# EAGLE board Sonar-Three-Amp-Block (EAGLE 8.7.1)
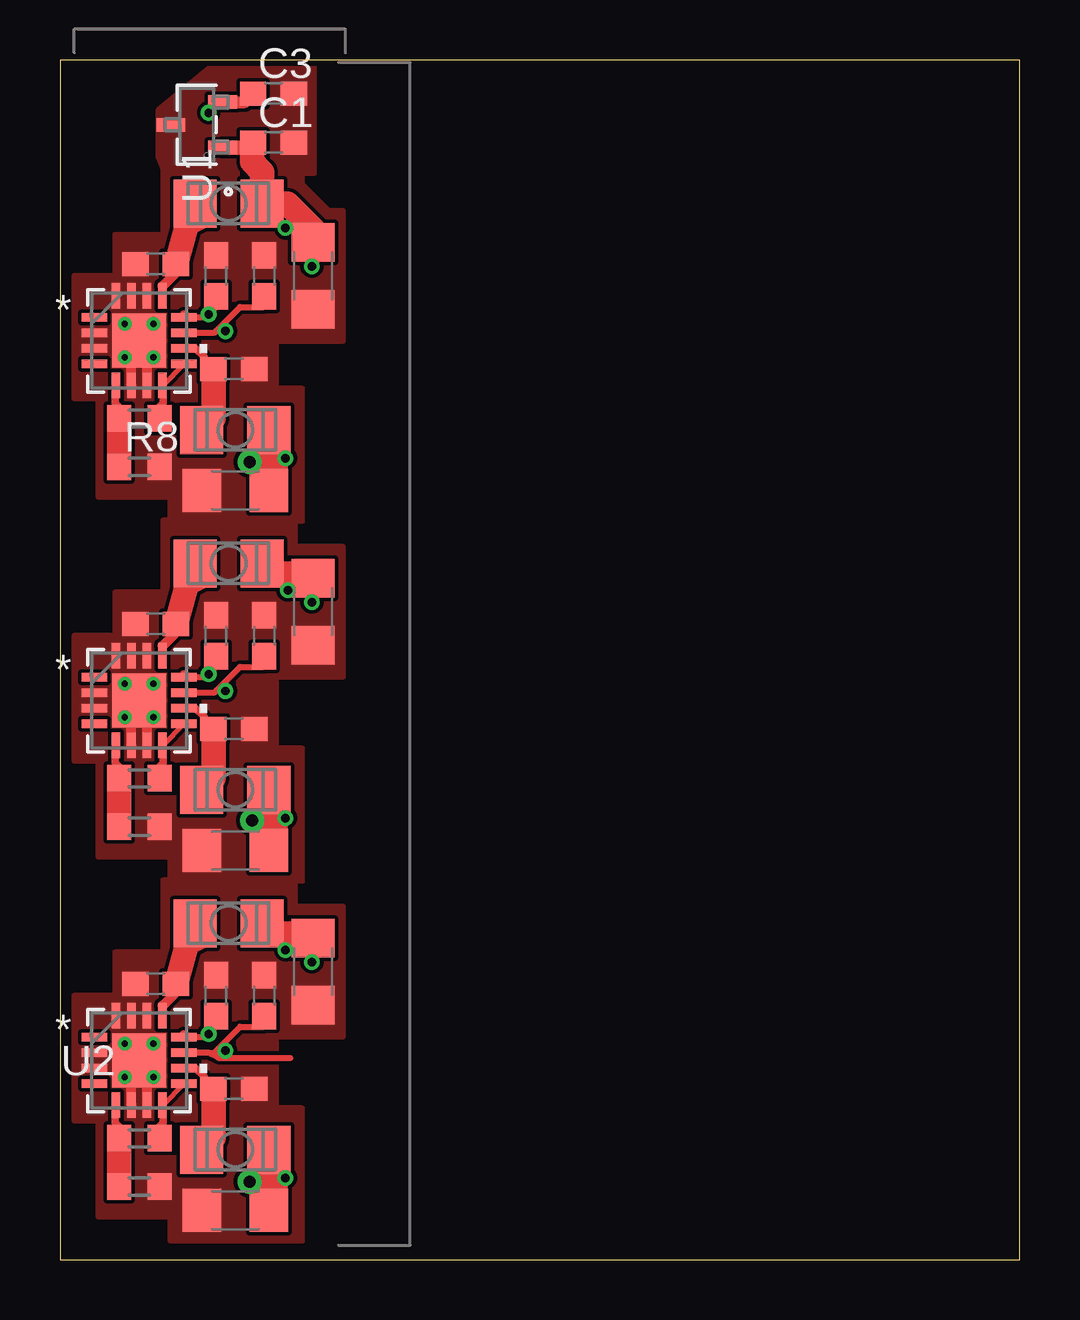
[diagram p0: board, top side]
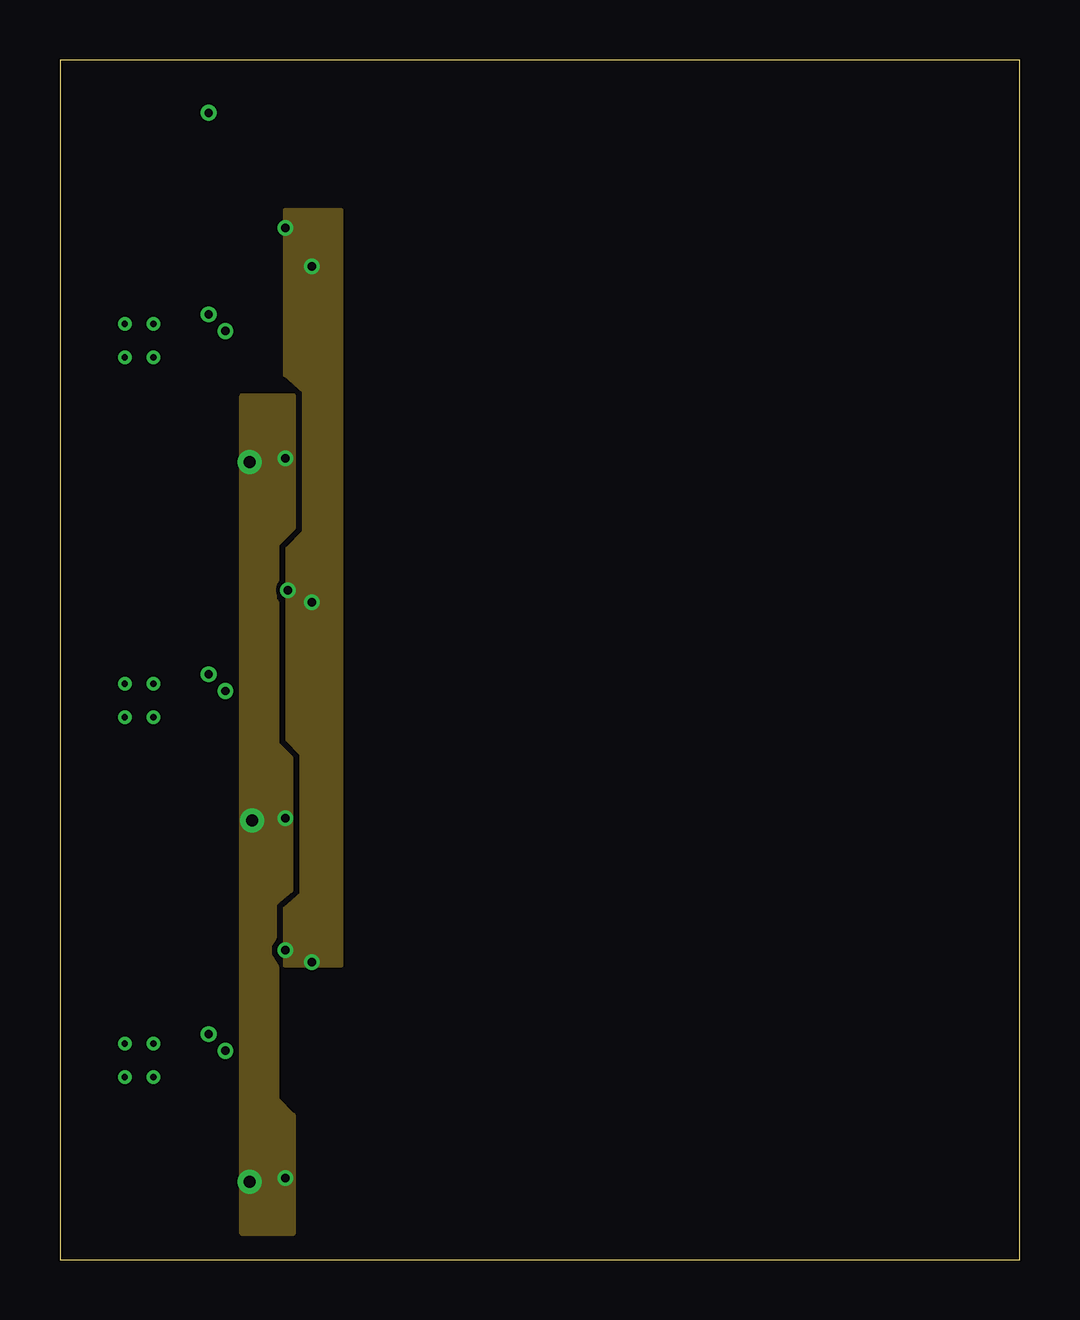
[diagram p1: board, inner layer Route15]
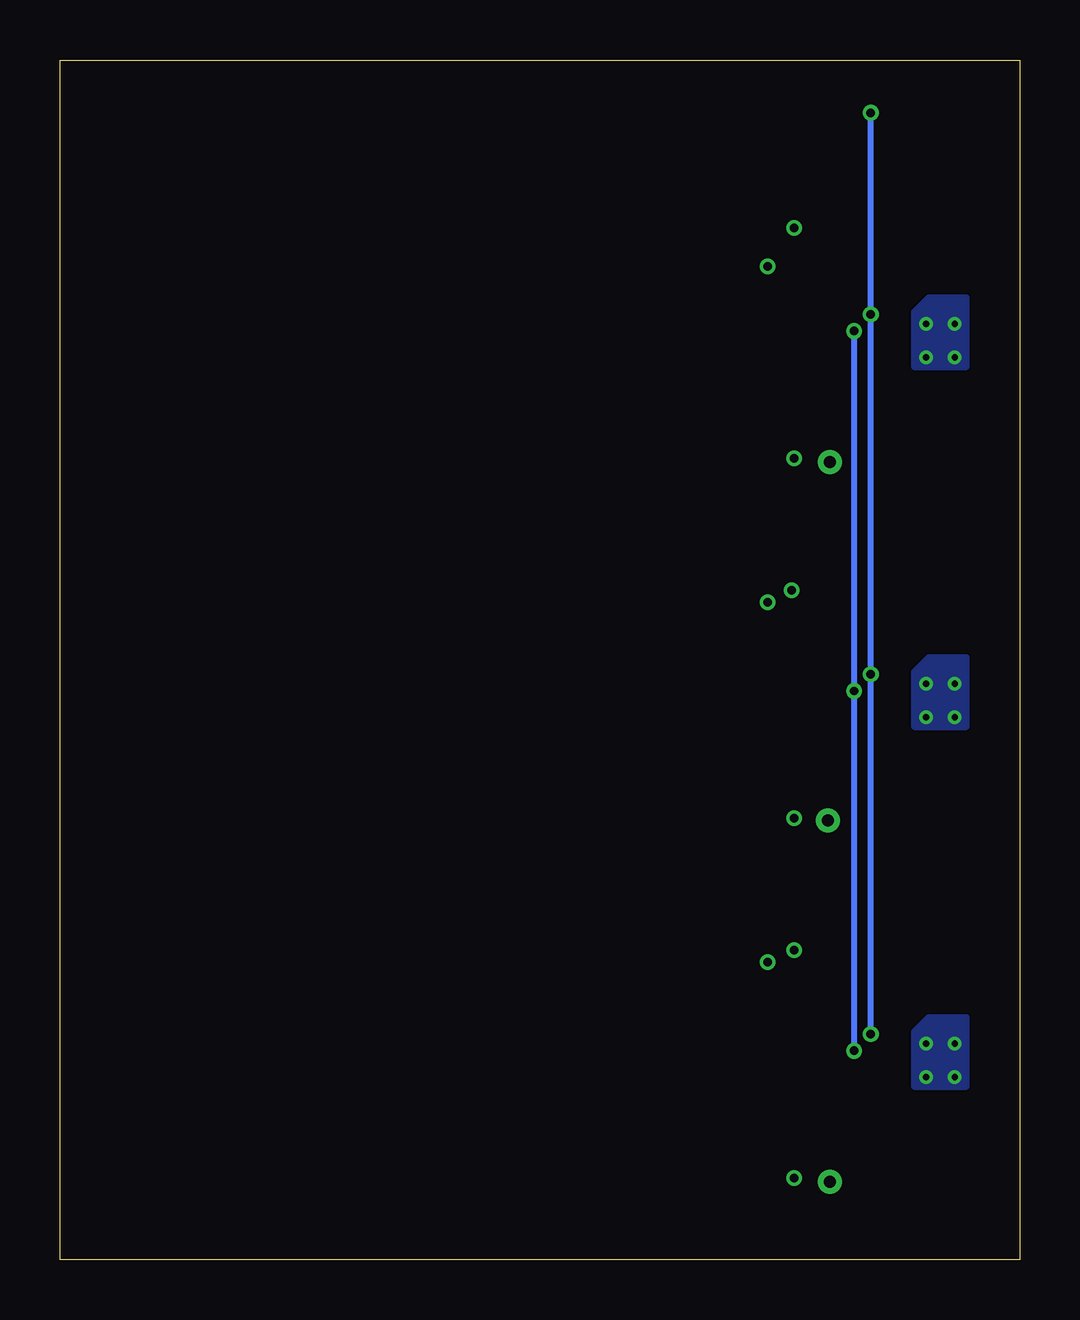
[diagram p2: board, bottom side, seen from below]

Size 40 x 50 mm. Coordinates in mm from the lower left corner, seen from the top.
Outline: 0,0 40,0 40,50 0,50 0,0
Copper layers (1*2*15*16): Top 0.035mm / dielectric 0.1702mm / Route2 0.0175mm / dielectric 47mil / Route15 0.0175mm / dielectric 0.1702mm / Bottom 0.035mm
Design rules "JLCPCB4Layer": minimum track width 6mil, minimum drill 10mil, track to track 6mil, track to pad 6mil, pad to pad 6mil, via to via 6mil, smd to smd 0mil, copper to edge 10mil, drill to drill 10mil, minimum pad ring 6mil, minimum via ring 6mil, stop-mask expansion 2mil, vias tented up to drill 100mil, thermal gap 10mil

## Footprints (pad centres in the part's own frame; a part is rotated, then mirrored left to right if it is on the bottom)
C0603 = smd 1.1 x 1: 1 -0.85,0; 2 0.85,0
C1206 = smd 1.6 x 1.8: 1 -1.4,0; 2 1.4,0
L3225P = smd 1.8 x 2: 1 -1.4,0; 2 1.4,0
R0603 = smd 1 x 1.1: 1 -0.85,0; 2 0.85,0
P3_064 = smd 0.559 x 1.194: 1 -0.95,-1.079; 2 0.95,-1.079; 3 0,1.079
CP_16_4 = smd 2.261 x 2.261: GND1 0,0 | smd 1.067 x 0.356: GNEG 1.865,0.975; GPOS 1.865,0.325; INPP -1.865,-0.975; PWRA -1.865,0.325; VCOM -1.865,-0.325; VGAI 1.865,-0.975; VNEG 1.865,-0.325; VOUT -1.865,0.975 | smd 0.356 x 1.067: INPN -0.975,-1.865; NC 0.325,-1.865; NC1 -0.325,-1.865; NC2 0.325,1.865; NC3 -0.325,1.865; NC4 -0.975,1.865; PRAO 0.975,-1.865; VPOS 0.975,1.865

## Placement (x,y rotation side)
C1  0.1uF  [C0603]  8.9,46.55 0 top
C3  0.1uF  [C0603]  8.9,48.6 0 top
C7  0.1uF  [C0603]  7.25,7.11 0 top
C8  10uF  [C1206]  7.31,2.05 180 top
C9  0.1uF  [C0603]  3.99,11.5 180 top
C10  10uF  [C1206]  10.55,12 270 top
C11  0.1uF  [C0603]  6.5,11 90 top
C12  1nF  [C0603]  8.52,11 90 top
C19  0.1uF  [C0603]  7.25,37.11 0 top
C20  10uF  [C1206]  7.31,32.05 180 top
C21  0.1uF  [C0603]  3.99,41.5 180 top
C22  10uF  [C1206]  10.55,41 270 top
C23  0.1uF  [C0603]  6.5,41 90 top
C24  1nF  [C0603]  8.52,41 90 top
C31  0.1uF  [C0603]  7.25,22.11 0 top
C32  10uF  [C1206]  7.31,17.05 180 top
C33  0.1uF  [C0603]  3.99,26.5 180 top
C34  10uF  [C1206]  10.55,27 270 top
C35  0.1uF  [C0603]  6.5,26 90 top
C36  1nF  [C0603]  8.52,26 90 top
L3  120nH  [L3225P]  7.31,4.58 0 top
L4  120nH  [L3225P]  7.03,14.02 0 top
L7  120nH  [L3225P]  7.31,34.58 0 top
L8  120nH  [L3225P]  7.03,44.02 0 top
L11  120nH  [L3225P]  7.31,19.58 0 top
L12  120nH  [L3225P]  7.03,29.02 0 top
R3  1.9k  [R0603]  3.31,5.06 180 top
R4  100  [R0603]  3.31,3.04 0 top
R7  1.9k  [R0603]  3.31,35.06 180 top
R8  100  [R0603]  3.31,33.04 0 top
R11  1.9k  [R0603]  3.31,20.06 180 top
R12  100  [R0603]  3.31,18.04 0 top
U1  ISL21080DIH309Z-TK  [P3_064]  5.7,47.3 90 top
U2  AD8336ACPZ-R7  [CP_16_4]  3.3,8.3 0 top
U4  AD8336ACPZ-R7  [CP_16_4]  3.3,38.3 0 top
U6  AD8336ACPZ-R7  [CP_16_4]  3.3,23.3 0 top

## Library data of the parts
C1 C3 C7 C9 C11 C12 C19 C21 C23 C24 C31 C33 C35 C36 = rcl; SPICEPREFIX: C
C8 C10 C20 C22 C32 C34 L3 L4 L7 L8 L11 L12 = resistor
R3 R4 R7 R8 R11 R12 = rcl; SPICEPREFIX: R
U1 = Amplifier-Sonar-Prototype-LBR; MANUFACTURER_PART_NUMBER: ISL21080DIH309ZTK; VENDOR: Intersil
U2 U4 U6 = Amplifier-Sonar-LBR; MANUFACTURER_PART_NUMBER: AD8336ACPZR7; VENDOR: Analog Devices Inc

## Nets
+5V: C1.1 C10.1 C22.1 C34.1 L4.2 L8.2 L12.2 U1.1
-5V: C8.1 C20.1 C32.1 L3.2 L7.2 L11.2
GAIN_NEG: C3.1 C11.1 C23.1 C35.1 U1.2 U2.GNEG U4.GNEG U6.GNEG
GAIN_POS: C12.1 C24.1 C36.1 U2.GPOS U4.GPOS U6.GPOS
GND: C1.2 C3.2 C7.2 C8.2 C9.2 C10.2 C11.2 C12.2 C19.2 C20.2 C21.2 C22.2 C23.2 C24.2 C31.2 C32.2 C33.2 C34.2 C35.2 C36.2 R4.2 R8.2 R12.2 U1.3 U2.GND1 U2.NC U2.NC1 U2.NC2 U2.NC3 U2.NC4 U2.PWRA U2.VCOM U4.GND1 U4.NC U4.NC1 U4.NC2 U4.NC3 U4.NC4 U4.PWRA U4.VCOM U6.GND1 U6.NC U6.NC1 U6.NC2 U6.NC3 U6.NC4 U6.PWRA U6.VCOM
INPN1: R7.2 R8.1 U4.INPN
INPN2: R11.2 R12.1 U6.INPN
INPN3: R3.2 R4.1 U2.INPN
INPUT1: U4.INPP
INPUT2: U6.INPP
INPUT3: U2.INPP
VGA_INPUT1: R7.1 U4.PRAO U4.VGAI
VGA_INPUT2: R11.1 U6.PRAO U6.VGAI
VGA_INPUT3: R3.1 U2.PRAO U2.VGAI
VNEG1: C19.1 L7.1 U4.VNEG
VNEG2: C31.1 L11.1 U6.VNEG
VNEG3: C7.1 L3.1 U2.VNEG
VOUT: U2.VOUT
VOUT1: U4.VOUT
VOUT2: U6.VOUT
VPOS1: C21.1 L8.1 U4.VPOS
VPOS2: C33.1 L12.1 U6.VPOS
VPOS3: C9.1 L4.1 U2.VPOS

## Tracks (layer width: path | path; a pad name or v marks a point on that pad's centre or on a via)
+5V  (via drill 0.35)
  Top 0.61: U1.1 8,46.35 8.05,46.4 C1.1 | v10.5,12.4 10.5,13.35 C10.1 | v10.5,27.4 10.5,28.35 C34.1 | v10.5,41.4 10.5,42.35 C22.1
  Top 1.016: L8.2 8.82,43.6 | L12.2 8.82,28.6 10.32,28.6 C34.1 | L4.2 8.82,13.6 10.32,13.6 C10.1 | L8.2 9.48,44.02 10.55,42.95 C22.1 | L8.2 8.43,45.33 8,45.76 8,46.35
  other vias: 9.4,43 9.5,27.9 9.4,12.9
  pour Route15 (no thermals): 11.7,43.7 9.4,43.7 9.4,36.9 10.2,36.2 10.2,30.3 9.5,29.6 9.5,21.7 10.1,21.1 10.1,15.2 9.4,14.6 9.4,12.3 11.7,12.3
-5V  (via drill 0.35, 0.5 pad 1)
  Top 0.61: v9.4,18.4 9.2,18.2 9.2,17.9 8.71,17.41 C32.1 | v9.4,33.4 9.2,33.2 9.2,32.9 8.71,32.41 C20.1 | v9.4,3.4 9.2,3.2 9.2,2.8 8.71,2.31 C8.1
  Top 0.813: v8,18.3 8.61,18.3 8.71,18.2 | v7.9,3.25 7.95,3.2 8.71,3.2 | v7.9,33.25 8.66,33.25 8.71,33.3
  Top 1.016: L7.2 8.71,33.3 C20.1 | L11.2 8.71,18.2 C32.1 | L3.2 8.71,3.2 C8.1
  pour Route15 (no thermals): 9.7,36 9.7,30.5 9,29.8 9,28.3 8.9,28.2 8.9,27.5 9,27.4 9,21.5 9.6,20.9 9.6,15.4 9.1,15 8.9,14.8 8.9,13.4 8.7,13.1 8.7,12.7 9,12.2 9,6.7 9.7,6 9.7,1.1 7.6,1.1 7.6,36
GAIN_NEG  (via drill 0.35)
  Top 0.254: U4.GNEG 6.08,39.27 v6.2,39.4 6.47,39.67 C23.1 | U6.GNEG 6.08,24.27 v6.2,24.4 6.47,24.67 C35.1 | U2.GNEG 6.08,9.28 v6.2,9.4 6.47,9.67 C11.1 | v6.2,47.8 6.65,48.25 U1.2
  Top 0.305: 5.17,39.41 U4.GNEG | 5.17,24.41 U6.GNEG | 5.17,9.41 U2.GNEG
  Top 0.508: U1.2 7.7,48.25 C3.1
  Bottom 0.254: v6.2,9.4 v6.2,24.4 v6.2,39.4 v6.2,47.8
GAIN_POS  (via drill 0.35)
  Top 0.254: U4.GPOS 6.42,38.62 6.5,38.7 | C24.1 8.48,39.7 7.5,39.7 6.5,38.7 | U6.GPOS 6.42,23.62 6.53,23.73 | C36.1 8.48,24.7 7.5,24.7 6.53,23.73 | 6.21,8.62 U2.GPOS | 6.21,8.62 6.58,8.43 | 6.58,8.43 6.63,8.4 9.6,8.4 | 6.21,8.62 6.42,8.62 7.5,9.7 8.48,9.7 C12.1 | v6.9,8.7 6.86,8.7 6.58,8.43 | v6.9,23.7 6.55,23.7 6.53,23.73 | v6.9,38.7 6.5,38.7
  Bottom 0.254: v6.9,38.7 v6.9,23.7 v6.9,8.7
GND  (via drill 0.26)
  Top 0.152: 2.98,37.98 3.2,38.2 | 3.2,38.2 U4.GND1 | 3.62,37.98 3.35,38.25 | 3.35,38.25 U4.GND1 | 3.08,37.98 3.35,38.25 | 2.33,39.08 3.2,38.2 | 2.98,38.62 3.25,38.35 | 3.62,38.73 3.25,38.35 | 3.25,38.35 U4.GND1 | 2.98,22.98 3.2,23.2 | 3.2,23.2 U6.GND1 | 3.62,22.98 3.35,23.25 | 3.35,23.25 U6.GND1 | 3.08,22.98 3.35,23.25 | 2.33,24.07 3.2,23.2 | 2.98,23.62 3.25,23.35 | 3.62,23.73 3.25,23.35 | 3.25,23.35 U6.GND1 | 2.98,7.97 3.2,8.2 | 3.2,8.2 U2.GND1 | 3.62,7.97 3.35,8.25 | 3.35,8.25 U2.GND1 | 3.08,7.97 3.35,8.25 | 2.33,9.07 3.2,8.2 | 2.98,8.62 3.25,8.35 | 3.62,8.72 3.25,8.35 | 3.25,8.35 U2.GND1
  Top 0.305: 2.35,40.19 U4.NC4 | 2.35,25.19 U6.NC4 | 2.35,10.19 U2.NC4
  Top 0.406: U4.NC1 2.98,37.98 | U4.NC 3.62,37.98 | U6.NC1 2.98,22.98 | U6.NC 3.62,22.98 | U2.NC1 2.98,7.97 | U2.NC 3.62,7.97
  other vias: 2.7,39 3.9,39 3.9,37.6 2.7,37.6 2.7,24 3.9,24 3.9,22.6 2.7,22.6 2.7,9 3.9,9 3.9,7.6 2.7,7.6
  pour Bottom (no thermals): 2.2,37.2 2.2,40.1 3.8,40.1 4.4,39.5 4.4,37.2
  pour Bottom (no thermals): 2.2,22.2 2.2,25.1 3.8,25.1 4.4,24.5 4.4,22.2
  pour Bottom (no thermals): 2.2,7.2 2.2,10.1 3.8,10.1 4.4,9.5 4.4,7.2
  pour Top (no thermals): 4.6,0.8 10.1,0.8 10.1,6.3 9,6.3 9,9.3 11.8,9.3 11.8,14.7 9.8,14.7 9.8,15.8 10.1,15.8 10.1,21.3 9,21.3 9,24.3 11.8,24.3 11.8,29.7 9.8,29.7 9.8,30.8 10.1,30.8 10.1,36.3 9,36.3 9,38.3 11.8,38.3 11.8,43.7 11.2,43.7 10.1,44.8 10.1,45.3 10.6,45.3 10.6,49.8 6.4,49.8 4.1,47.9 4.1,46 4.3,45.5 4.3,42.7 2.3,42.7 2.3,41 0.6,41 0.6,35.9 1.6,35.9 1.6,31.8 4.6,31.8 4.6,30.8 4.3,30.8 4.3,27.8 2.3,27.8 2.3,26 0.6,26 0.6,20.8 1.6,20.8 1.6,16.8 4.6,16.8 4.6,15.8 4.3,15.8 4.3,12.8 2.3,12.8 2.3,11 0.6,11 0.6,5.8 1.6,5.8 1.6,1.8 4.6,1.8
INPN1
  Top 0.305: R7.2 2.46,35.54 2.3,35.7 2.3,36.41 U4.INPN
  Top 1.016: R8.1 R7.2
INPN2
  Top 0.305: R11.2 2.46,20.54 2.3,20.7 2.3,21.41 U6.INPN
  Top 1.016: R12.1 R11.2
INPN3
  Top 0.305: R3.2 2.46,5.54 2.3,5.7 2.3,6.41 U2.INPN
  Top 1.016: R4.1 R3.2
VGA_INPUT1
  Top 0.2: U4.VGAI U4.PRAO
  Top 0.305: R7.1 4.16,35.56 4.3,35.7 4.3,36.41 U4.PRAO
VGA_INPUT2
  Top 0.2: U6.VGAI U6.PRAO
  Top 0.305: R11.1 4.16,20.56 4.3,20.7 4.3,21.41 U6.PRAO
VGA_INPUT3
  Top 0.2: U2.VGAI U2.PRAO
  Top 0.305: R3.1 4.16,5.56 4.3,5.7 4.3,6.41 U2.PRAO
VNEG1
  Top 0.254: U4.VNEG 5.66,37.98
  Top 0.305: C19.1 6,37.51 6,37.63 5.66,37.98
  Top 0.813: L7.1 6.4,35.07
  Top 1.016: 6.4,35.07 C19.1
VNEG2
  Top 0.254: U6.VNEG 5.66,22.98
  Top 0.305: C31.1 6,22.51 6,22.63 5.66,22.98
  Top 0.813: L11.1 6.4,20.07
  Top 1.016: 6.4,20.07 C31.1
VNEG3
  Top 0.254: U2.VNEG 5.66,7.97
  Top 0.305: C7.1 6,7.51 6,7.63 5.66,7.97
  Top 0.813: L3.1 6.4,5.07
  Top 1.016: 6.4,5.07 C7.1
VPOS1
  Top 0.254: U4.VPOS 4.28,40.58
  Top 0.406: C21.1 4.75,41.05 4.28,40.58
  Top 1.016: C21.1 5.3,43.16 6.02,43.53 L8.1
VPOS2
  Top 0.254: U6.VPOS 4.28,25.57
  Top 0.406: C33.1 4.75,26.05 4.28,25.57
  Top 1.016: C33.1 5.3,28.16 6.02,28.53 L12.1
VPOS3
  Top 0.254: U2.VPOS 4.28,10.57
  Top 0.406: C9.1 4.75,11.05 4.28,10.57
  Top 1.016: C9.1 5.3,13.16 6.02,13.53 L4.1